# EAGLE board skyboard (EAGLE 9.6.2)

Size 160 x 100 mm. Coordinates in mm from the lower left corner, seen from the top.
Outline: 0,0 160,0 160,100 0,100 0,0
Copper layers (1*16): Top 0.035mm / dielectric 1.5mm / Bottom 0.035mm
Design rules "default": minimum track width 6mil, minimum drill 0.35mm, track to track 6mil, track to pad 6mil, pad to pad 6mil, via to via 6mil, smd to smd 6mil, copper to edge 40mil, drill to drill 6mil, minimum pad ring 10mil, minimum via ring 8mil, stop-mask expansion 4mil, vias tented up to drill 0mil, thermal gap 10mil
Net classes: 0 default: width 0.305 mm; 1 Power: width 0.508 mm

## Footprints (pad centres in the part's own frame; a part is rotated, then mirrored left to right if it is on the bottom)
SMARTPRJ_C1206 = smd 1.6 x 1.8: 1 -1.4,0; 2 1.4,0
DIODE_MINIMELF = smd 1.4 x 1.8: A 1.7,0; C -1.7,0
RCL_L1812 = smd 1.9 x 3.4: 1 -1.95,0; 2 1.95,0
2,8 = hole 2.8: 0,0
SOT23-5 = smd 0.6 x 1.2: 1 -0.95,-1.306; 2 0,-1.306; 3 0.95,-1.306; 4 0.95,1.306; 5 -0.95,1.306
INTEGRATEDCIRCUITS_TQFP100 = smd 1.5 x 0.3: 1 -8,6; 2 -8,5.5; 3 -8,5; 4 -8,4.5; 5 -8,4; 6 -8,3.5; 7 -8,3; 8 -8,2.5; 9 -8,2; 10 -8,1.5; 11 -8,1; 12 -8,0.5; 13 -8,0; 14 -8,-0.5; 15 -8,-1; 16 -8,-1.5; 17 -8,-2; 18 -8,-2.5; 19 -8,-3; 20 -8,-3.5; 21 -8,-4; 22 -8,-4.5; 23 -8,-5; 24 -8,-5.5; 25 -8,-6; 51 8,-6; 52 8,-5.5; 53 8,-5; 54 8,-4.5; 55 8,-4; 56 8,-3.5; 57 8,-3; 58 8,-2.5; 59 8,-2; 60 8,-1.5; 61 8,-1; 62 8,-0.5; 63 8,0; 64 8,0.5; 65 8,1; 66 8,1.5; 67 8,2; 68 8,2.5; 69 8,3; 70 8,3.5; 71 8,4; 72 8,4.5; 73 8,5; 74 8,5.5; 75 8,6 | smd 0.3 x 1.5: 26 -6,-8; 27 -5.5,-8; 28 -5,-8; 29 -4.5,-8; 30 -4,-8; 31 -3.5,-8; 32 -3,-8; 33 -2.5,-8; 34 -2,-8; 35 -1.5,-8; 36 -1,-8; 37 -0.5,-8; 38 0,-8; 39 0.5,-8; 40 1,-8; 41 1.5,-8; 42 2,-8; 43 2.5,-8; 44 3,-8; 45 3.5,-8; 46 4,-8; 47 4.5,-8; 48 5,-8; 49 5.5,-8; 50 6,-8; 76 6,8; 77 5.5,8; 78 5,8; 79 4.5,8; 80 4,8; 81 3.5,8; 82 3,8; 83 2.5,8; 84 2,8; 85 1.5,8; 86 1,8; 87 0.5,8; 88 0,8; 89 -0.5,8; 90 -1,8; 91 -1.5,8; 92 -2,8; 93 -2.5,8; 94 -3,8; 95 -3.5,8; 96 -4,8; 97 -4.5,8; 98 -5,8; 99 -5.5,8; 100 -6,8
PHOENIX_1725656 = drill 1.1 square: 1 1.5,3.1 | drill 1.1: 2 4.04,3.1 | hole 1.1: 1.5,0.56; 4.04,0.56
1X02 = drill 1.016 long: 1 -1.27,0; 2 1.27,0
WUERTH-ELEKTRONIK_1206 = smd 1.35 x 1.2: 1 -1.7,0; 2 1.65,0
INDUTTANZE_0805 = smd 1.2 x 1: 1 -1.1,0; 2 1.1,0
LED-1206 = smd 1.2 x 1.4: A -1.5,0; C 1.5,0
R1206 = smd 1.6 x 1.803: 1 -1.422,0; 2 1.422,0
SMARTPRJ_R1206 = smd 1.6 x 1.803: 1 -1.422,0; 2 1.422,0
RESISTOR-DIL_CAY16 = smd 0.559 x 1.016: 1 -1.283,-0.934; 2 -0.408,-0.94; 3 0.462,-0.943; 4 1.322,-0.942; 5 1.318,0.874; 6 0.452,0.877; 7 -0.42,0.877; 8 -1.289,0.883
GM1WA55311A = smd 1.2 x 0.65: 1 -1.535,0.856; 2 -1.535,-0.856; 3 0.9,-0.856; 4 0.9,0.856
MYSOIC8 = smd 1.97 x 0.6: 1 -2.47,1.905; 2 -2.47,0.635; 3 -2.47,-0.635; 4 -2.47,-1.905; 5 2.47,-1.905; 6 2.47,-0.635; 7 2.47,0.635; 8 2.47,1.905
SMARTPRJ_PN61729 = drill 0.95 pad 1.676 octagon: 1 1.25,4.71; 2 -1.25,4.71; 3 -1.25,2.71; 4 1.25,2.71 | drill 2.2: P$1 -6,0; P$2 6,0
OSC_CSTNE16M0V530000R0 = smd 0.4 x 1.9: 1 -1.2,0; 2 0,0; 3 1.2,0

## Placement (x,y rotation side)
C1  100n  [SMARTPRJ_C1206]  86.36,63.5 0 top
C14  1u  [SMARTPRJ_C1206]  88.9,29.21 0 top
C15  0.1u  [SMARTPRJ_C1206]  36.83,73.66 0 top
C16  100n  [SMARTPRJ_C1206]  80.01,63.5 0 top
C17  100n  [SMARTPRJ_C1206]  73.66,63.5 0 top
C18  100n  [SMARTPRJ_C1206]  67.31,63.5 0 top
C19  100n  [SMARTPRJ_C1206]  60.96,63.5 0 top
C20  22p  [SMARTPRJ_C1206]  83.82,29.21 0 top
CC1  10u  [SMARTPRJ_C1206]  81.28,73.66 0 top
CC3  0.1u  [SMARTPRJ_C1206]  74.93,73.66 0 top
CC4  0.1u  [SMARTPRJ_C1206]  68.58,73.66 0 top
CC5  0.1u  [SMARTPRJ_C1206]  62.23,73.66 0 top
CC6  0.1u  [SMARTPRJ_C1206]  55.88,73.66 0 top
D5  CD1206-S01575  [DIODE_MINIMELF]  92.71,63.5 0 top
F1  MF-MSMF050-2 500mA  [RCL_L1812]  20.32,29.21 0 top
H1  MOUNT-HOLE2.8  [2,8]  154.94,6.35 0 top
H2  MOUNT-HOLE2.8  [2,8]  5.08,93.98 0 top
H3  MOUNT-HOLE2.8  [2,8]  5.08,5.08 0 top
H4  MOUNT-HOLE2.8  [2,8]  154.94,93.98 0 top
IC3  OPA344N-SOT23  [SOT23-5]  44.45,34.29 0 top
IC4  ATMEGA2560-15AU  [INTEGRATEDCIRCUITS_TQFP100]  114.3,48.26 0 top
J2  1725656  [PHOENIX_1725656]  67.31,8.89 0 top
JP5  [1X02]  35.56,92.71 180 top
JP6  [1X02]  55.88,87.63 0 top
L1  BLM21  [WUERTH-ELEKTRONIK_1206]  33.02,52.07 0 top
L3  10uH  [INDUTTANZE_0805]  27.94,52.07 0 top
L4  YELLOW  [LED-1206]  22.86,52.07 0 top
ON1  GREEN  [LED-1206]  17.78,52.07 0 top
R7  2.2  [R1206]  78.74,29.21 0 top
R9  2.2  [R1206]  73.66,29.21 0 top
R10  2.2  [R1206]  68.58,29.21 0 top
R11  10k  [R1206]  63.5,29.21 0 top
R12  10k  [R1206]  58.42,29.21 0 top
R13  2.2K  [R1206]  49.53,73.66 0 top
R14  2.2K  [R1206]  43.18,73.66 0 top
R23  1M  [SMARTPRJ_R1206]  53.34,29.21 0 top
RN5  10k  [RESISTOR-DIL_CAY16]  105.41,15.24 0 top
RN6  1k  [RESISTOR-DIL_CAY16]  53.34,54.61 0 top
U$3  MY_RGB  [GM1WA55311A]  82.55,41.91 0 top
U$4  MYLM4862  [MYSOIC8]  41.91,13.97 0 top
X2  USB-B_TH  [SMARTPRJ_PN61729]  10.16,71.12 270 top
Y3  CSTNE16M0V530000R0  [OSC_CSTNE16M0V530000R0]  38.1,53.34 0 top

## Library data of the parts
C1 C14-C20 CC1 CC3-CC6 D5 F1 L1 R23 RN5 RN6 X2 = UNO-TH_Rev3e
H1-H4 = holes
IC3 = linear
IC4 = MEGA2560_Rev3e; CASE: TQFP100_14x14; MONTHLY_USAGE: _____; PART_NUMBER: ATMEGA2560-16AU; PRICE: _____; SUPPLIER: _____; TYPE: Circuito_Integrato
J2 = 1725656; MANUFACTURER: Phoenix Contact; MAXIMUM_PACKAGE_HEIGHT: 8.65mm; PARTREV: 03.03.2021; STANDARD: Manufacturer Recommendations
JP5 JP6 = pinhead
L3 = UNO-TH_Rev3e; CASE: 0805; MONTHLY_USAGE: _____; PART_NUMBER: CV201210-100K; PRICE: _____; SUPPLIER: _____; TYPE: Induttanze
L4 ON1 = SparkFun-LED
R7 R9-R14 = resistor_3rdPin_v20
U$3 = MyD
U$4 = LM4862M_NOPB
Y3 = CSTNE16M0V530000R0; MANUFACTURER: Murata; MAXIMUM_PACKAGE_HEIGHT: 1mm; PARTREV: JGC42-8853B; STANDARD: Manufacturer Recomendations

## Nets
ADC0: IC4.97
ADC1: IC4.96
ADC2: IC4.95
ADC3: IC4.94
ADC4: IC4.93
ADC5: IC4.92
ADC6: IC4.91
ADC7: IC4.90
ADC8: IC4.89
ADC9: IC4.88
ADC10: IC4.87
ADC11: IC4.86
ADC12: IC4.85
ADC13: IC4.84
ADC14: IC4.83
ADC15: IC4.82
AREF: C18.2 IC4.98
BLUE: IC4.15 R10.1
GND: C1.1 C14.1 C16.1 C17.1 C18.1 C19.1 C20.1 CC1.2 CC3.2 CC4.2 CC5.2 IC3.2 IC4.11 IC4.32 IC4.62 IC4.81 IC4.99 L1.1 L4.C ON1.C U$4.1 U$4.7 X2.4 Y3.2
GREEN: IC4.16 R9.1
N$1: CC6.1 R13.1 R14.2
N$2: IC4.24
N$3: IC4.5
N$4: IC4.7
N$6: R10.2 U$3.3
N$9: ON1.A RN6.3
N$12: R9.2 U$3.4
N$13: R7.2 U$3.1
N$14: C14.2 U$4.2 U$4.3
N$15: R11.2 R12.1 U$4.4
N$16: C15.2 R11.1
N$17: J2.2 R12.2 U$4.5
N$18: J2.1 U$4.8
N$19: JP6.1 R13.2
N$20: CC5.1 IC3.3 R14.1
N$21: CC6.2 IC3.1 IC3.4 JP5.1
N$24: C19.2 IC4.100 L3.1
N$26: L4.A RN6.4
N$124: IC4.27
PA0: IC4.78
PA1: IC4.77
PA2: IC4.76
PA3: IC4.75
PA4: IC4.74
PA5: IC4.73
PA6: IC4.72
PA7: IC4.71
PB0: IC4.19
PB1: IC4.20
PB2: IC4.21
PB3: IC4.22
PB4: IC4.23
PB6: IC4.25
PB7: IC4.26 RN6.5
PC0: IC4.53
PC1: IC4.54
PC2: IC4.55
PC3: IC4.56
PC4: IC4.57
PC5: IC4.58
PC6: IC4.59
PC7: IC4.60
PE0: IC4.2
PE1: IC4.3
PE3: JP6.2
PE4: IC4.6
PG0: IC4.51
PG1: IC4.52
PG2: IC4.70
PG5: IC4.1
PH3: IC4.8
PH4: IC4.9
PH5: IC4.17 R7.1
PH6: IC4.18
PL0: IC4.35
PL1: IC4.36
PL2: IC4.37
PL3: IC4.38
PL4: IC4.39
PL5: IC4.40
PL6: IC4.41
PL7: IC4.42
PRE: C15.1 JP5.2
RESET: C20.2 D5.A IC4.30 RN5.8
RXD2: IC4.12
RXD3: IC4.63
SUPPLY1_+5V: C1.2 C16.2 C17.2 CC1.1 CC3.1 CC4.1 D5.C F1.2 IC3.5 IC4.10 IC4.31 IC4.61 IC4.80 L3.2 RN5.1 RN6.6 U$3.2 U$4.6
TXD2: IC4.13
TXD3: IC4.64
UNSHIELD: L1.2 X2.P$1 X2.P$2
XTAL1: IC4.34 R23.1 Y3.3
XTAL2: IC4.33 R23.2 Y3.1
XUSB: F1.1 X2.1

## Tracks (layer width: path | path; a pad name or v marks a point on that pad's centre or on a via)
AREF  (1 unrouted)
BLUE  (1 unrouted)
GND  (23 unrouted)
GREEN  (1 unrouted)
N$1  (2 unrouted)
N$6  (1 unrouted)
N$9  (1 unrouted)
N$12  (1 unrouted)
N$13  (1 unrouted)
N$14  (2 unrouted)
N$15  (2 unrouted)
N$16  (1 unrouted)
N$17  (2 unrouted)
N$18  (1 unrouted)
N$19  (1 unrouted)
N$20  (2 unrouted)
N$21  (3 unrouted)
N$24  (2 unrouted)
N$26  (1 unrouted)
PB7  (1 unrouted)
PH5  (1 unrouted)
PRE  (1 unrouted)
RESET  (3 unrouted)
SUPPLY1_+5V  (17 unrouted)
UNSHIELD  (2 unrouted)
XTAL1  (2 unrouted)
XTAL2  (2 unrouted)
XUSB  (1 unrouted)